# Altium PCB VESC_DEVICE.PcbDoc
Units mm, origin at the board's own origin, x right, y up, seen from the top; angles counter-clockwise.
Board outline 90 x 36 mm, 4 copper layers (TOP, LAYER_1, LAYER_2, BOTTOM), stack 0.732 mm thick; 120 components, 103 nets, 415 pads, 564 vias.
Unrouted connection lines stored in the file: 2.
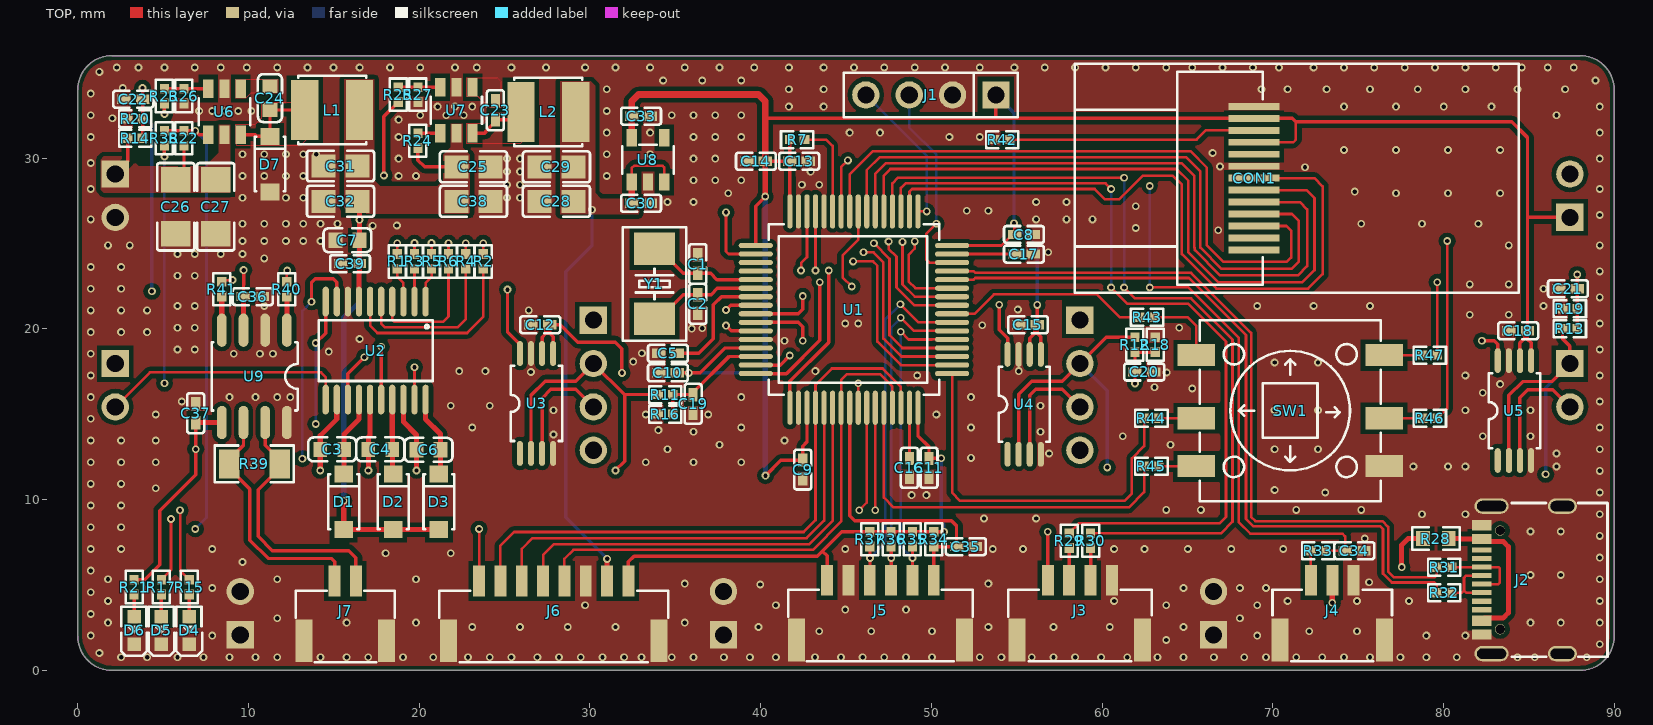
[diagram p0: TOP view]
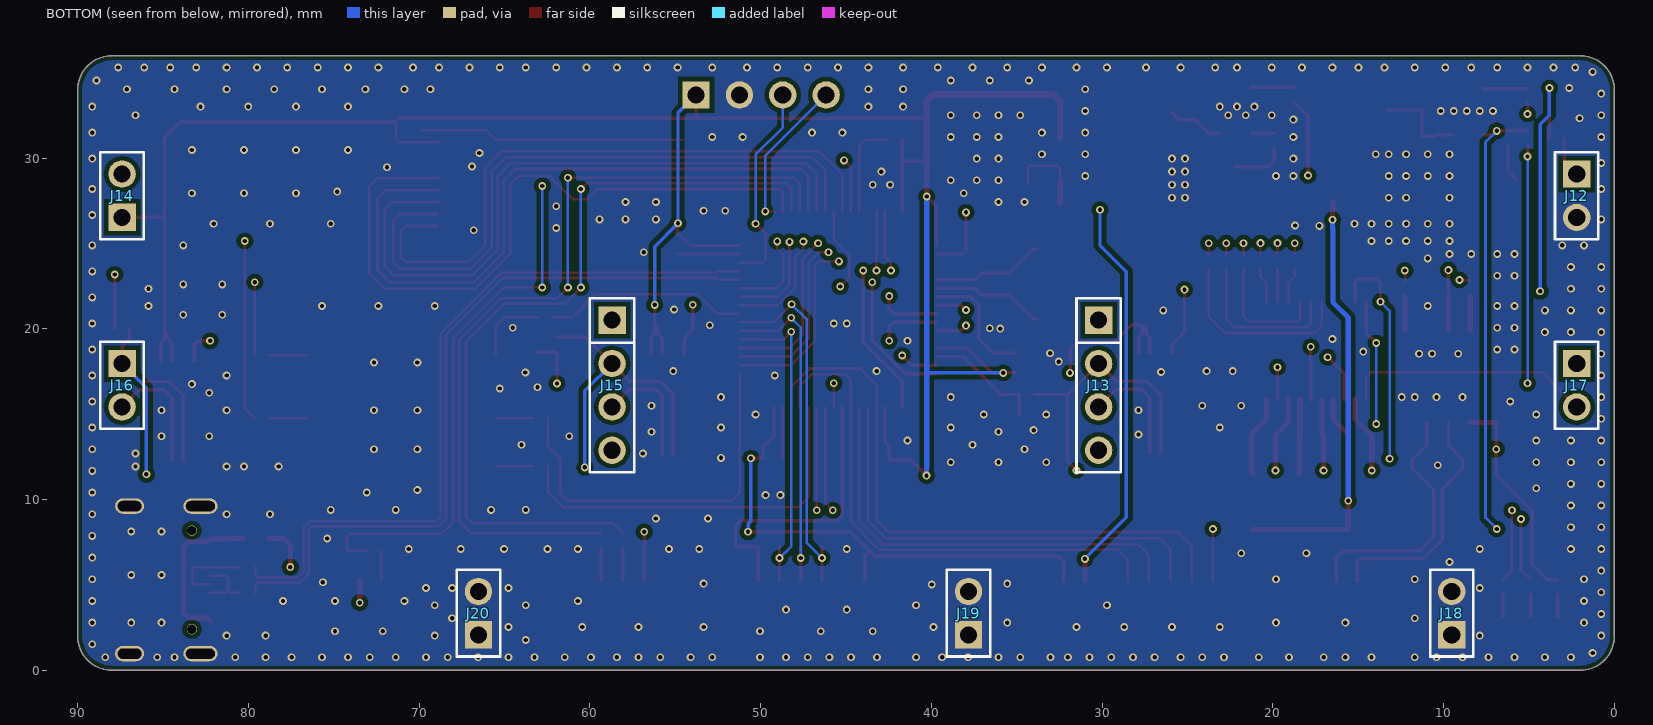
[diagram p1: BOTTOM view, seen from below]
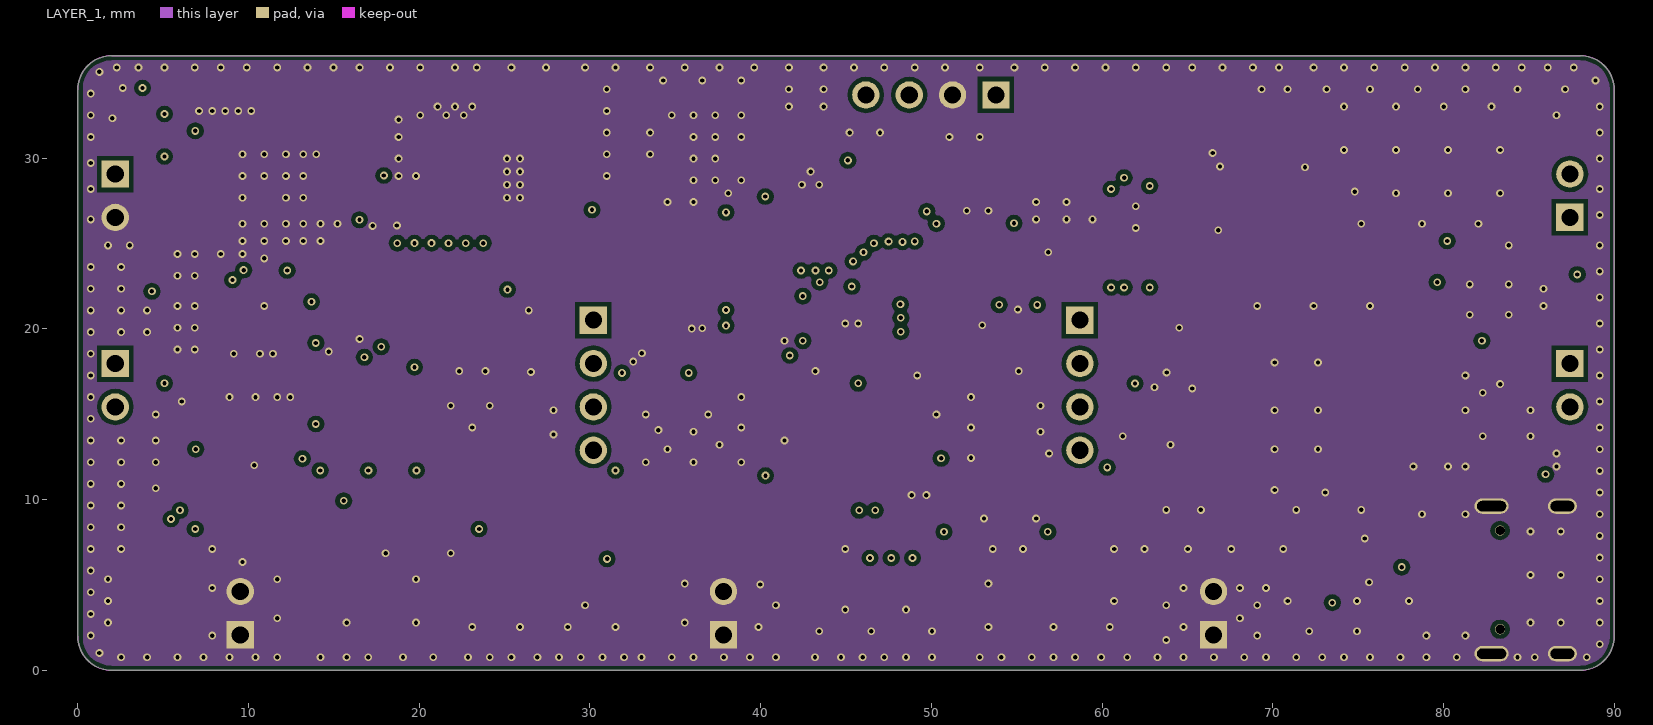
[diagram p2: LAYER_1]
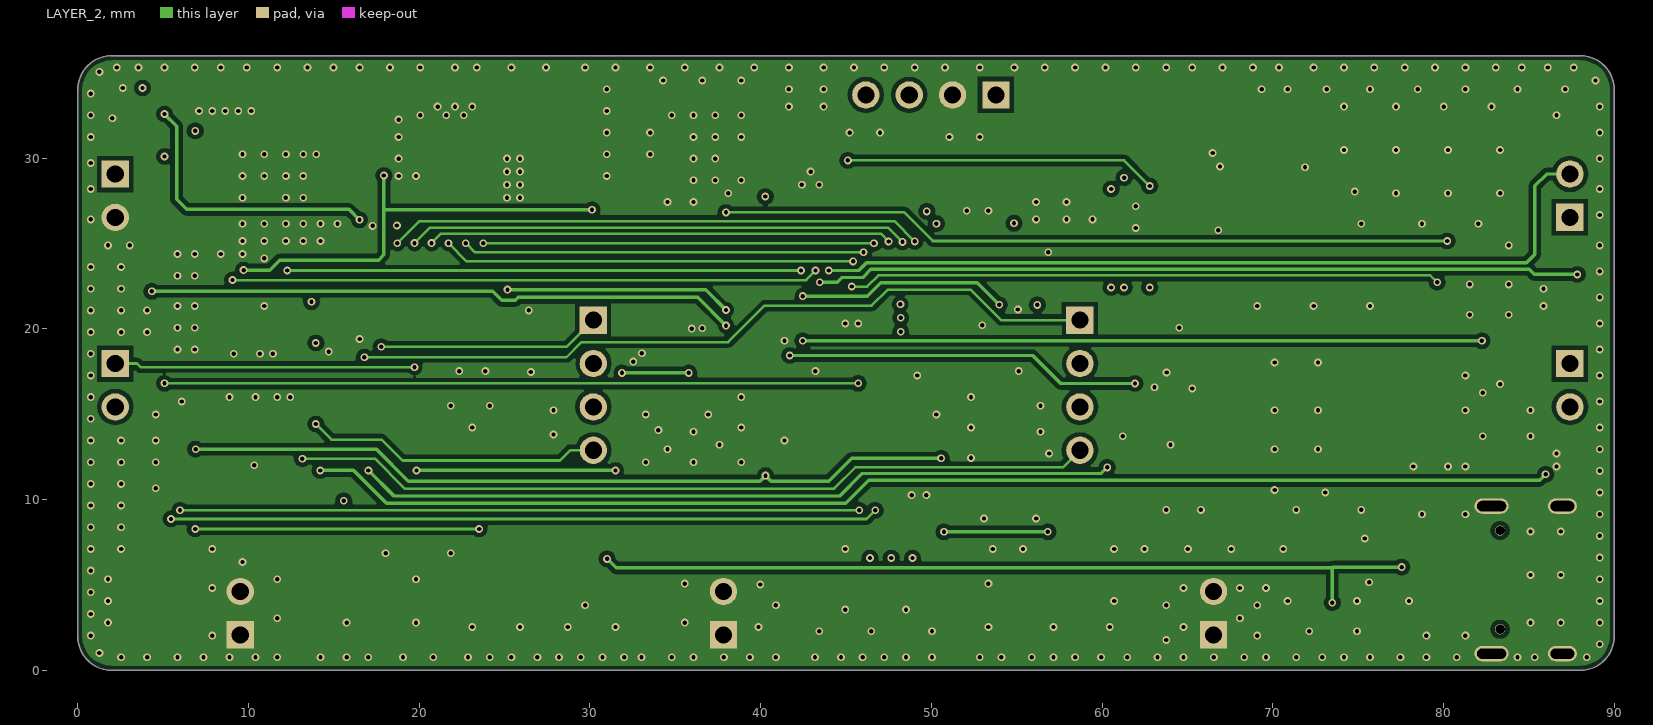
[diagram p3: LAYER_2]

## Layer stack, top to bottom
Top Solder: solder mask 0.0102, Solder Resist, Dk 3.5
TOP: signal copper 0.0305
Dielectric 1: core 0.2032, FR-4, Dk 4.5
LAYER_1: signal copper 0.0305
Dielectric2: core 0.2032, FR-4, Dk 4.5
LAYER_2: signal copper 0.0305
Dielectric3: core 0.2032, FR-4, Dk 4.5
BOTTOM: signal copper 0.0305
Bottom Solder: solder mask 0.0102, Solder Resist, Dk 3.5

## Board outline
2,0 cw(c2,2) 0,2 0,34 cw(c2,34) 2,36 88,36 cw(c88,34) 90,34 90,2 cw(c88,2) 88,0

## Design rules (kind name [scope] priority, off if disabled: settings)
BoardOutlineClearance [All] p1: gap=0.254 ignorepadtopadclearanceinfootprint=FALSE except(0: Arc-SplitContinuation Track-SplitContinuation SMDPad-SplitContinuation THPad-SplitContinuation Via-SplitContinuation Fill-SplitContinuation Poly-SplitContinuation Region-SplitContinuation Text-SplitContinuation)
Clearance [All] p1: gap=0.254 ignorepadtopadclearanceinfootprint=FALSE except(0: Arc-Hole Track-Hole SMDPad-Hole THPad-Hole Via-Hole Fill-Hole Poly-Hole Region-Hole Text-Hole)
PlaneConnect [All] p1: planeconnectstyle=Direct reliefexpansion=0.508 reliefentries=4 reliefconductorwidth=0.254 reliefairgap=0.254
PolygonConnect [All] p1: connectstyle=Direct reliefconductorwidth=0.254 reliefentries=4 polygonreliefangle="90 Angle" airgapwidth=0.254
RoomDefinition PAGE3 [InComponentClass('PAGE3')] p1: confinementstyle=ConfineIn formatcopy=TRUE lockcomponents=FALSE outline 0,0 50.8,0 50.8,25.4 0,25.4
RoomDefinition PAGE2 [InComponentClass('PAGE2')] p2: confinementstyle=ConfineIn formatcopy=TRUE lockcomponents=FALSE outline 0,0 50.8,0 50.8,25.4 0,25.4
RoomDefinition PAGE1 [InComponentClass('PAGE1')] p3: confinementstyle=ConfineIn formatcopy=TRUE lockcomponents=FALSE outline 0,0 50.8,0 50.8,25.4 0,25.4
RoutingVias [All] p1: holewidth=0.711 width=1.27 viastyle="Through Hole" minholewidth=0.711 minwidth=1.27 maxholewidth=0.711 maxwidth=1.27
SolderMaskExpansion [All] p1: expansion=0.102 istentingtop=FALSE
SupplyNets "Schematic Supply Nets_7" [InNet('12V')] p1: voltage=0.000
SupplyNets "Schematic Supply Nets_6" [InNet('3V3')] p2: voltage=0.000
SupplyNets "Schematic Supply Nets_5" [InNet('SHA')] p3: voltage=0.000
SupplyNets "Schematic Supply Nets_4" [InNet('GND')] p4: voltage=0.000
SupplyNets "Schematic Supply Nets_3" [InNet('SHC')] p5: voltage=0.000
SupplyNets "Schematic Supply Nets_2" [InNet('5V')] p6: voltage=0.000
SupplyNets "Schematic Supply Nets_1" [InNet('VIN')] p7: voltage=0.000
SupplyNets "Schematic Supply Nets" [InNet('SHB')] p8: voltage=0.000
Width [All] p1: maxlimit=0.254 minlimit=0.254 preferedwidth=0.254
29 further rules are at their usual default settings.

## Classes and differential pairs
component class PAGE3: CON1 J12 J13 J14 J15 J16 J17 J18 J19 J20 R42 R43 R44 R45 R46 R47 SW1
component class PAGE2: C23 C24 C25 C26 C27 C28 C29 C30 C31 C32 C33 C34 C35 C36 C37 C38 D7 J2 J3 J4 J5 J6 J7 L1 L2 R22 R23 R24 R25 R26 R27 R28 R29 R30 R31 R32 R33 R34 R35 R36 R37 R38 R39 R40 R41 U6 U7 U8 U9
component class PAGE1: C1 C2 C3 C4 C5 C6 C7 C8 C9 C10 C11 C12 C13 C14 C15 C16 C17 C18 C19 C20 C21 C22 C39 D1 D2 D3 D4 D5 D6 J1 R1 R2 R3 R4 R5 R6 R7 R11 R12 R13 R14 R15 R16 R17 R18 R19 R20 R21 U1 U2 U3 U4 U5 Y1

## Components (designator, comment, footprint, x,y, rotation, side; value= is the part's Value field where it differs from the comment)
C1 "15pF/50V" C0402 36.322,23.8 r270 top
C2 "15pF/50V" C0402 36.322,21.463 r90 top
C3 "2.2uF/50V" C0603 14.904,12.939 r0 top
C4 "2.2uF/50V" C0603 17.726,12.939 r0 top
C5 "100nF/50V" C0402 34.569,18.567 r180 top
C6 "2.2uF/50V" C0603 20.546,12.913 r0 top
C7 "10uF/16V" C0603 15.799,25.197 r0 top
C8 "2.2uF/6.3V" C0402 55.423,25.527 r180 top
C9 "2.2uF/6.3V" C0402 42.469,11.76 r90 top
C10 "2.2uF/6.3V" C0402 34.569,17.424 r0 top
C11 "2.2uF/6.3V" C0402 49.86,11.862 r90 top
C12 "2.2nF/50V" C0402 27.094,20.244 r0 top
C13 "2.2uF/6.3V" C0402 42.253,29.82 r180 top
C14 "2.2uF/6.3V" C0402 39.726,29.82 r0 top
C15 "2.2nF/50V" C0402 55.659,20.244 r0 top
C16 "2.2uF/6.3V" C0402 48.717,11.862 r270 top
C17 "2.2uF/6.3V" C0402 55.423,24.384 r0 top
C18 "2.2nF/50V" C0402 84.371,19.888 r0 top
C19 "NC" C0402 36.043,15.608 r90 top
C20 "NC" C0402 62.471,17.475 r180 top
C21 "NC" C0402 87.286,22.352 r0 top
C22 "100nF/50V" C0402 3.251,33.452 r0 top
C23 "10nF/50V" C0402 24.468,32.805 r90 top
C24 "100nF/100V" C0603 11.26,33.519 r90 top
C25 "22uF/16V" C0805 23.18,29.49 r0 top
C26 "2.2uF/100V" C1206 5.74,27.153 r270 top
C27 "2.2uF/100V" C1206 8.077,27.153 r270 top
C28 "22uF/6.3V" C0805 28.042,27.47 r180 top
C29 "22uF/6.3V" C0805 28.042,29.49 r180 top
C30 "10uF/6.3V" C0402 32.995,27.356 r0 top
C31 "22uF/16V" C0805 15.392,29.54 r180 top
C32 "22uF/16V" C0805 15.392,27.47 r180 top
C33 "10uF/6.3V" C0402 32.995,32.461 r0 top
C34 "100nF/50V" C0402 74.778,7.01 r180 top
C35 "100nF/50V" C0402 52.019,7.251 r0 top
C36 "2.2uF/6.3V" C0402 10.255,21.895 r180 top
C37 "2.2uF/6.3V" C0402 6.909,15.061 r90 top
C38 "22uF/16V" C0805 23.18,27.47 r0 top
C39 "100nF/50V" C0402 15.951,23.825 r0 top
CON1 "OLED" 0_78OLED 71.399,28.828 r0 top
D1 "DSK310" SOD-123F 15.58,9.875 r270 top
D2 "DSK310" SOD-123F 18.478,9.875 r270 top
D3 "DSK310" SOD-123F 21.153,9.875 r270 top
D4 "LED_GREEN" LED0603 6.528,2.337 r90 top
D5 "LED_RED" LED0603 4.902,2.337 r90 top
D6 "LED_BLUE" LED0603 3.302,2.337 r90 top
D7 "DSK310" SOD-123F 11.26,29.649 r270 top
J1 "4 HEADER" ISP-4P-2_54 49.973,33.704 r180 top
J2 "TYPE-C_16P" TYPE-C_16P 85.601,5.3 r90 top
J3 "1.25-4PWTDK" SMD-4P-1_25 58.7,3.327 r0 top
J4 "1.25-3PWTDK" SMD-3P-1_25 73.482,3.327 r0 top
J5 "1.25-6PWTDK" SMD-6P-1_25 47.015,3.327 r0 top
J6 "1.25-8PWTDK" SMD-8P-1_25 27.883,3.277 r0 top
J7 "1.25-2PWTDK" SMD-2P-1_25 15.672,3.277 r0 top
J12 "CON2" PZ-2P-2_54 2.2,27.8 r270 bottom
J13 "CON4" PZ-4P-2_54 30.2,16.7 r270 bottom
J14 "CON2" PZ-2P-2_54 87.4,27.8 r90 bottom
J15 "CON4" PZ-4P-2_54 58.7,16.7 r270 bottom
J16 "CON2" PZ-2P-2_54 87.4,16.7 r270 bottom
J17 "CON2" PZ-2P-2_54 2.2,16.7 r270 bottom
J18 "CON2" PZ-2P-2_54 9.52,3.35 r90 bottom
J19 "CON2" PZ-2P-2_54 37.82,3.35 r90 bottom
J20 "CON2" PZ-2P-2_54 66.53,3.35 r90 bottom
L1 "22uH_1A" L4020 14.905,32.818 r0 top
L2 "2.2uH_2A" L4020 27.564,32.706 r0 top
R1 "0R/1%" R0402 18.72,23.952 r90 top
R2 "0R/1%" R0402 23.749,23.952 r90 top
R3 "0R/1%" R0402 19.725,23.952 r90 top
R4 "0R/1%" R0402 22.733,23.952 r90 top
R5 "0R/1%" R0402 20.726,23.952 r90 top
R6 "0R/1%" R0402 21.717,23.952 r90 top
R7 "10K/1%" R0402 42.139,31.09 r180 top
R11 "39K/1%" R0402 34.417,16.154 r180 top
R12 "39K/1%" R0402 61.925,19.075 r90 top
R13 "39K/1%" R0402 87.4,20.015 r180 top
R14 "39K/1%" R0402 3.365,31.166 r180 top
R15 "2.2K/1%" R0402 6.528,4.877 r270 top
R16 "2.2K/1%" R0402 34.417,15.011 r0 top
R17 "2.2K/1%" R0402 4.902,4.877 r270 top
R18 "2.2K/1%" R0402 63.119,19.075 r270 top
R19 "2.2K/1%" R0402 87.4,21.184 r0 top
R20 "2.2K/1%" R0402 3.365,32.309 r0 top
R21 "2.2K/1%" R0402 3.302,4.877 r270 top
R22 "100K/1%" R0402 6.223,31.166 r270 top
R23 "120K/1%" R0402 5.08,33.636 r270 top
R24 "100K/1%" R0402 19.927,31.024 r90 top
R25 "100K/1%" R0402 18.771,33.722 r270 top
R26 "8.2K/1%" R0402 6.223,33.636 r90 top
R27 "13.7K/1%" R0402 19.927,33.722 r90 top
R28 "NC" R0603 79.553,7.722 r180 top
R29 "22R/1%" R0402 58.075,7.595 r90 top
R30 "22R/1%" R0402 59.325,7.595 r90 top
R31 "22R/1%" R0402 80.043,6.045 r180 top
R32 "22R/1%" R0402 80.043,4.547 r180 top
R33 "100R/1%" R0402 72.664,7.01 r0 top
R34 "10K/1%" R0402 50.14,7.683 r90 top
R35 "4.7K/1%" R0402 48.89,7.683 r90 top
R36 "4.7K/1%" R0402 47.64,7.683 r90 top
R37 "4.7K/1%" R0402 46.391,7.683 r90 top
R38 "NC_10K/1%" R0402 5.08,31.166 r90 top
R39 "120R/1%" R1206 10.344,12.09 r180 top
R40 "0R/1%" R0402 12.249,22.323 r90 top
R41 "0R/1%" R0402 8.439,22.327 r90 top
R42 "10R/1%" R0402 54.153,31.09 r180 top
R43 "100R/1%" R0402 62.636,20.676 r180 top
R44 "100R/1%" R0402 62.89,14.765 r180 top
R45 "100R/1%" R0402 62.89,11.965 r180 top
R46 "100R/1%" R0402 79.197,14.765 r180 top
R47 "100R/1%" R0402 79.197,18.465 r180 top
SW1 "SW_TM_2027" SW_SMD_6P_10X10 71.018,15.215 r0 top
U1 "STM32F405RGT6" LQFP64_10X10_05P 45.466,21.133 r270 top
U2 "FD6288T" TSSOP-20 17.45,18.73 r180 top
U3 "INA240A1PWR" TSSOP-8 26.873,15.632 r0 top
U4 "INA240A1PWR" TSSOP-8 55.438,15.581 r0 top
U5 "INA240A1PWR" TSSOP-8 84.15,15.215 r0 top
U6 "LMR16006XDDCR" SOT-23-6 8.594,32.719 r90 top
U7 "LP6460B6F" SOT-23-6 22.179,32.805 r90 top
U8 "XC6219B332MR" SOT-23-5 33.399,29.896 r270 top
U9 "TJA1042T/1J" SOP-8 10.344,17.22 r180 top
Y1 "8M" SMD5032-2P 33.782,22.631 r90 top

## Footprints (in the part's own frame and the unit in brackets; to place one, negate y for a bottom-side part, rotate by r counter-clockwise, add the part's x,y. Pads: shape width x height; smd on the part's side, far side on the other; paste and mask are expansions set on the pad)
0_78OLED [mm] "0_78OLED"
  rect 3x0.4 smd: 1(-2.5,-4.2) 2(-2.5,-3.5) 3(-2.5,-2.8) 4(-2.5,-2.1) 5(-2.5,-1.4) 6(-2.5,-0.7) 7(-2.5,0) 8(-2.5,0.7) 9(-2.5,1.4) 10(-2.5,2.1) 11(-2.5,2.8) 12(-2.5,3.5) 13(-2.5,4.2)
  silkscreen extent -13,-6.7 13,6.7
C0402 [mil] "C0402"
  rect 31.1x21.3 smd: 1(-21.5,0) 2(21.5,0)
  silkscreen extent -46,-20 46,20, body extent -43,-16 43,16, height 150
C0603 [mil] "C0603"
  rect 31.5x35.4 smd: 1(-27.6,0) 2(27.6,0)
  silkscreen extent -55,-28 55,28
C0805 [mil] "C0805"
  rect 55.5x53.1 smd: 1(-39.4,0) 2(39.4,0)
  silkscreen extent -77,-36 77,36
C1206 [mil] "C1206"
  rect 58.5x68 smd: 1(-62.7,0) 2(62.6,0)
  silkscreen extent -101,-43 101,43, body extent -95,-39 95,39, height 150
ISP-4P-2_54 [mm] "ISP-4P-2_54"
  rect 1.6x1.6 hole 1: 1(-3.81,0)
  round 1.6 hole 1: 2(-1.27,0) 3(1.27,0) 4(3.81,0)
  silkscreen extent -5.1,-1.3 5.1,1.3, body extent -4.7,-0.9 4.7,0.9, height 3.81
L4020 [mil] "L4020"
  rect 63x137.8 smd: 1(-63,0) 2(63,0)
  silkscreen extent -79,-79 79,79
LED0603 [mil] "LED0603"
  rect 31.5x31.5 smd: 1(-31.5,0) 2(31.5,0)
  silkscreen extent -59,-30 55,30, body extent -51,-20 51,20, height 150
LQFP64_10X10_05P [mil] "LQFP64_10X10_05P"
  oval 11.8x78.7 smd: 1(-147.6,-226.4) 2(-128,-226.4) 3(-108.3,-226.4) 4(-88.6,-226.4) 5(-68.9,-226.4) 6(-49.2,-226.4) 7(-29.5,-226.4) 8(-9.8,-226.4) 9(9.8,-226.4) 10(29.5,-226.4) 11(49.2,-226.4) 12(68.9,-226.4) 13(88.6,-226.4) 14(108.3,-226.4) 15(128,-226.4) 16(147.6,-226.4) 33(147.6,226.4) 34(128,226.4) 35(108.3,226.4) 36(88.6,226.4) 37(68.9,226.4) 38(49.2,226.4) 39(29.5,226.4) 40(9.8,226.4) 41(-9.8,226.4) 42(-29.5,226.4) 43(-49.2,226.4) 44(-68.9,226.4) 45(-88.6,226.4) 46(-108.3,226.4) 47(-128,226.4) 48(-147.6,226.4)
  oval 78.7x11.8 smd: 17(226.4,-147.6) 18(226.4,-128) 19(226.4,-108.3) 20(226.4,-88.6) 21(226.4,-68.9) 22(226.4,-49.2) 23(226.4,-29.5) 24(226.4,-9.8) 25(226.4,9.8) 26(226.4,29.5) 27(226.4,49.2) 28(226.4,68.9) 29(226.4,88.6) 30(226.4,108.3) 31(226.4,128) 32(226.4,147.6) 49(-226.4,147.6) 50(-226.4,128) 51(-226.4,108.3) 52(-226.4,88.6) 53(-226.4,68.9) 54(-226.4,49.2) 55(-226.4,29.5) 56(-226.4,9.8) 57(-226.4,-9.8) 58(-226.4,-29.5) 59(-226.4,-49.2) 60(-226.4,-68.9) 61(-226.4,-88.6) 62(-226.4,-108.3) 63(-226.4,-128) 64(-226.4,-147.6)
  silkscreen extent -197,-239 197,197, body extent -268,-268 268,268, height 150
PZ-2P-2_54 [mm] "PZ-2P-2_54"
  rect 1.6x1.6 hole 1: 1(-1.27,0)
  round 1.6 hole 1: 2(1.27,0)
  silkscreen extent -2.54,-1.27 2.54,1.27, body extent -2.2,-0.9 2.2,0.9, height 3.81
PZ-4P-2_54 [mm] "PZ-4P-2_54"
  rect 1.6x1.6 hole 1: 1(-3.81,0)
  round 1.6 hole 1: 2(-1.27,0) 3(1.27,0) 4(3.81,0)
  silkscreen extent -5.1,-1.3 5.1,1.3, body extent -4.7,-0.9 4.7,0.9, height 3.81
R0402 [mil] "R0402"
  rect 22.3x21.3 smd: 1(-17,0) 2(17,0)
  silkscreen extent -37,-20 37,20, body extent -32,-16 32,16, height 150
R0603 [mil] "R0603"
  rect 31.7x34 smd: 1(-29.6,0) 2(29.6,0)
  silkscreen extent -54,-26 54,26, body extent -51,-20 51,20, height 150
R1206 [mm] "R1206"
  rect 1.199x1.699 smd: 1(-1.478,0) 2(1.478,0)
  silkscreen extent -2.31,-1.08 2.31,1.08, body extent -2.2,-1 2.2,1, height 3.81
SMD5032-2P [mil] "SMD5032-2P"
  rect 74.8x94.5 smd: 1(-80.7,0) 2(80.7,0)
  silkscreen extent -131,-73 131,73, body extent -122,-51 122,51, height 150
SMD-2P-1_25 [mil] "SMD-2P-1_25"
  rect 27.6x70.9 smd: 1(-24.6,76.75) 2(24.6,76.75)
  rect 39.4x98.4 smd: 3(-95.5,-61.05) 4(95.5,-61.05)
  silkscreen extent -114,-110 114,55
SMD-3P-1_25 [mm] "SMD-3P-1_25"
  rect 0.701x1.801 smd: 1(-1.25,1.95) 2(0,1.95) 3(1.25,1.95)
  rect 1.001x2.499 smd: 4(-3.05,-1.551) 5(3.05,-1.551)
  silkscreen extent -3.5,-2.8 3.5,1.4
SMD-4P-1_25 [mm] "SMD-4P-1_25"
  rect 0.701x1.801 smd: 1(-1.874,1.95) 2(-0.625,1.95) 3(0.625,1.95) 4(1.874,1.95)
  rect 1.001x2.499 smd: 5(-3.675,-1.551) 6(3.675,-1.551)
  silkscreen extent -4.2,-2.8 4.2,1.4
SMD-6P-1_25 [mil] "SMD-6P-1_25"
  rect 27.6x70.9 smd: 1(-123,76.75) 2(-73.8,76.75) 3(-24.6,76.75) 4(24.6,76.75) 5(73.8,76.75) 6(123,76.75)
  rect 39.4x98.4 smd: 7(-193.9,-61.05) 8(193.9,-61.05)
  silkscreen extent -213,-110 213,55
SMD-8P-1_25 [mil] "SMD-8P-1_25"
  rect 27.6x70.9 smd: 1(-172.2,76.75) 2(-123,76.75) 3(-73.8,76.75) 4(-24.6,76.75) 5(24.6,76.75) 6(73.8,76.75) 7(123,76.75) 8(172.2,76.75)
  rect 39.4x98.4 smd: 9(-243.1,-61.05) 10(243.1,-61.05)
  silkscreen extent -264,-110 264,55
SOD-123F [mm] "SOD-123F"
  rect 1.001x1.1 smd: 1(-1.628,0) 2(1.628,0)
  silkscreen extent -1.6,-0.9 1.6,0.9, body extent -2.2,-0.7 2.2,0.7, height 3.81
SOP-8 [mil] "SOP-8"
  oval 22.4x76.8 smd: 1(-75,-106.5) 2(-25,-106.5) 3(25,-106.5) 4(75,-106.5) 5(75,106.5) 6(25,106.5) 7(-25,106.5) 8(-75,106.5)
  silkscreen extent -118,-118 98,79, body extent -91,-150 91,150, height 150
SOT-23-5 [mm] "SOT-23-5"
  rect 1.001x0.599 smd: 1(1.301,-0.95) 2(1.301,0) 3(1.301,0.95) 4(-1.301,0.95) 5(-1.301,-0.95)
  silkscreen extent -0.9,-1.83 1.53,1.5, body extent -1.9,-1.4 1.9,1.4, height 3.81
SOT-23-6 [mm] "SOT-23-6"
  rect 1.1x0.599 smd: 1(1.349,-0.95) 2(1.349,0) 3(1.349,0.95) 4(-1.349,0.95) 5(-1.349,0) 6(-1.349,-0.95)
  silkscreen extent -0.8,-1.93 1.63,1.5, body extent -2,-1.4 2,1.4, height 3.81
SW_SMD_6P_10X10 [mm] "SW_SMD_6P_10X10"
  rect 2.2x1.3 smd: 1(-5.5,3.25) 2(-5.5,-0.45) 3(-5.5,-3.25) 4(5.5,-3.25) 5(5.5,-0.45) 6(5.5,3.25)
  silkscreen extent -5.3,-5.3 5.3,5.3
TSSOP-8 [mm] "TSSOP-8"
  oval 0.353x1.453 smd: 1(-0.975,-2.926) 2(-0.325,-2.926) 3(0.325,-2.926) 4(0.975,-2.926) 5(0.975,2.926) 6(0.325,2.926) 7(-0.325,2.926) 8(-0.975,2.926)
  silkscreen extent -2,-3.1 1.5,2.2
TSSOP-20 [mil] "TSSOP-20"
  oval 14.3x68.6 smd: 1(-115.2,-113) 2(-89.6,-113) 3(-64,-113) 4(-38.4,-113) 5(-12.8,-113) 6(12.8,-113) 7(38.4,-113) 8(64,-113) 9(89.6,-113) 10(115.2,-113) 11(115.2,113) 12(89.6,113) 13(64,113) 14(38.4,113) 15(12.8,113) 16(-12.8,113) 17(-38.4,113) 18(-64,113) 19(-89.6,113) 20(-115.2,113)
  silkscreen extent -132,-70 132,70, body extent -126,-150 126,150, height 150
TYPE-C_16P [mil] "TYPE-C_16P"
  oval 35.4x78.7 hole 23.6 slot 66.9 at 90 deg: 1(-170.1,109.8) 2(170.1,109.8)
  oval 35.4x66.9 hole 23.6 slot 55.1 at 90 deg: 3(-170.1,-53.6) 4(170.1,-53.6)
  rect 23.6x45.3 smd: A1B12(-126,132.4) A4B9(-94.5,132.4) B1A12(126,132.4) B4A9(94.5,132.4)
  rect 11.8x45.3 smd: A5(-49.2,132.4) A6(-9.8,132.4) A7(9.8,132.4) A8(49.2,132.4) B5(68.9,132.4) B6(29.5,132.4) B7(-29.5,132.4) B8(-68.9,132.4)
  round 23.6 hole 21.7 unplated: PH1(-113.8,90.1) PH2(113.8,90.1)
  silkscreen extent -177,-158 177,63, body extent -193,-158 193,158, height 150

## Part data
C1 C2 C3 C4 C5 C6 C7 C8 C9 C10 C11 C12 C13 C14 C15 C16 C17 C18 C19 C20 C21 C22 C23 C24 C25 C26 C27 C28 C29 C30 C31 C32 C33 C34 C35 C36 C37 C38 C39: library part "CAP NP"
  C1 C2 C5 C8 C9 C10 C11 C12 C13 C14 C15 C16 C17 C18 C19 C20 C21 C22 C23 C30 C33 C34 C35 C36 C37 C39: PCB Footprint=C0402
  C3 C4 C6 C7 C24: PCB Footprint=C0603
  C25 C28 C29 C31 C32 C38: PCB Footprint=C0805
  C26 C27: PCB Footprint=C1206
D1 D2 D3 D7: library part "DIODE SCHOTTKY21", PCB Footprint=SOD-123F
D4 D5 D6: library part LED, PCB Footprint=LED0603
L1 L2: library part INDUCTOR, PCB Footprint=L4020
R1 R2 R3 R4 R5 R6 R7 R11 R12 R13 R14 R15 R16 R17 R18 R19 R20 R21 R22 R23 R24 R25 R26 R27 R28 R29 R30 R31 R32 R33 R34 R35 R36 R37 R38 R39 R40 R41 R42 R43 R44 R45 R46 R47: library part RESISTOR
  R1 R2 R3 R4 R5 R6 R7 R11 R12 R13 R14 R15 R16 R17 R18 R19 R20 R21 R22 R23 R24 R25 R26 R27 R29 R30 R31 R32 R33 R34 R35 R36 R37 R38 R40 R41 R42 R43 R44 R45 R46 R47: PCB Footprint=R0402
  R28: PCB Footprint=R0603
  R39: PCB Footprint=R1206
Y1: library part CRYSTAL, PCB Footprint=SMD5032-2P
CON1: PCB Footprint=0_78OLED
J1: PCB Footprint=ISP-4P-2_54
J2: PCB Footprint=TYPE-C_16P
J3: PCB Footprint=SMD-4P-1_25
J4: PCB Footprint=SMD-3P-1_25
J5: PCB Footprint=SMD-6P-1_25
J6: PCB Footprint=SMD-8P-1_25
J7: PCB Footprint=SMD-2P-1_25
J12 J14 J16 J17 J18 J19 J20: PCB Footprint=PZ-2P-2_54
J13 J15: PCB Footprint=PZ-4P-2_54
SW1: PCB Footprint=SW_SMD_6P_10X10
U1: PCB Footprint=LQFP64_10X10_05P
U2: PCB Footprint=TSSOP-20
U3 U4 U5: PCB Footprint=TSSOP-8
U6 U7: PCB Footprint=SOT-23-6
U8: PCB Footprint=SOT-23-5
U9: PCB Footprint=SOP-8

## Via types
v1: diameter 0.457, hole 0.254, TOP to BOTTOM, tented both sides, 473 vias
v2: diameter 0.457, hole 0.254, TOP to BOTTOM, 91 vias

## Nets (pads, with @x,y where several pads share a name; then routed paths per layer and width w, separated by ;. In a path a pad name is that pad's centre, name@x,y a point inside that pad or via, vN(x,y) a via of type N, cw(c..) or ccw(c..) an arc to the next point about the centre after c; other vN are vias at no path point)
3V3: C8.2 C9.2 C10.2 C11.2 C12.2 C13.2 C14.2 C15.2 C18.2 C33.1 C37.1 CON1.10 CON1.12 J1.1 J3.1 J5.1 J6.8 J14.1 R7.2 R21.1 R34.2 R35.2 R36.2 R37.2 U1.1 U1.13 U1.19 U1.32 U1.48 U1.64 U3.5 U3.6 U4.5 U4.6 U5.5 U5.6 U8.5 U9.5 | length 258.7
  TOP w0.152: U1.48 54.107,24.882 54.752,25.527 C8.2 ; CON1.10 71.197,30.928 71.349,31.08 71.349,32.128
  TOP w0.2: R21.1 3.937,5.309 4.801,6.172 4.801,9.347 6.909,11.455 v2(6.909,12.954) C37.1 ; U3.6 27.198,19.511 27.425,19.738 ; U3.5 27.849,19.538 27.649,19.738 ; v2(31.877,17.424) 31.877,18.847 31.496,19.228 29.278,19.228 28.262,20.244 C12.2 ; J6.8 32.256,6.354 32.583,6.68 43.307,6.68 43.612,6.985 ; C10.2 v2(35.789,17.424) 36.474,17.424 37.932,18.882 U1.13 ; U1.1 39.715,27.193 v2(40.272,27.749) ; C14.2 C13.2 ; 40.272,32.334 40.278,32.328 53.797,32.328 ; v2(40.284,11.405) 41.186,12.306 C9.2 42.469,13.137 42.715,13.383 U1.19 ; R7.2 C13.2 ; U1.64 41.717,28.882 41.707,28.893 C13.2 ; J5.1 43.891,6.705 43.612,6.985 ; U1.32 49.215,13.752 49.86,13.106 C11.2 49.873,12.421 v2(50.571,12.421) ; v2(50.736,8.115) R34.2 R35.2 R36.2 R37.2 44.742,8.115 43.612,6.985 ; J1.1 53.783,32.343 53.797,32.328 ; v2(54.839,26.187) 54.877,26.149 C8.2 ; U4.6 55.763,19.46 56.049,19.746 ; v2(56.205,21.407) C15.2 ; U4.5 56.413,19.538 56.205,19.746 ; v2(56.82,8.115) 56.82,7.622 56.825,7.616 J3.1 ; U5.6 84.475,19.172 84.747,19.444 ; U5.5 85.126,19.182 84.917,19.391 ; J14.1 84.93,26.53 84.917,26.543 ; 27.425,19.738 27.425,19.914 ; 27.425,19.738 27.649,19.738 ; 27.425,19.914 27.425,20.029 C12.2 ; 27.425,19.914 27.598,19.914 27.649,19.863 ; C12.2 27.649,20.235 27.649,19.863 ; 27.649,19.738 27.649,19.863 ; 53.797,32.328 CON1.12 71.149,32.328 71.349,32.128 84.001,32.128 84.917,31.211 84.917,26.543 ; 56.049,19.746 56.049,20.088 C15.2 ; 56.049,19.746 56.205,19.746 ; 56.205,19.746 C15.2 ; 84.747,19.444 84.864,19.444 84.917,19.391 ; 84.747,19.444 84.747,19.718 C18.2 ; 84.917,19.391 C18.2 ; C18.2 84.917,26.543
  TOP w0.3: C37.1 U9.5 ; v2(40.272,27.749) C14.2
  TOP w0.4: U8.5 C33.1 32.448,33.331 32.848,33.731 39.872,33.731 40.272,33.331 40.272,32.334 C14.2
  LAYER_2 w0.2: v2(6.909,12.954) 17.501,12.954 19.372,11.082 39.962,11.082 v2(40.284,11.405) 40.607,11.082 44.001,11.082 45.339,12.421 v2(50.571,12.421) ; v2(31.877,17.424) v2(35.789,17.424) ; v2(50.736,8.115) v2(56.82,8.115)
  BOTTOM w0.2: v2(35.789,17.424) 40.221,17.424 40.272,17.374 ; v2(50.571,12.421) 50.571,8.735 50.736,8.571 v2(50.736,8.115) ; J1.1 54.839,32.648 v2(54.839,26.187) 56.205,24.821 v2(56.205,21.407)
  BOTTOM w0.3: v2(40.272,27.749) 40.272,17.374 40.272,11.873 40.284,11.86 v2(40.284,11.405)
5V: C28.1 C29.1 C30.1 C36.2 J4.2 J6.7 L2.2 R25.2 R28.2 U8.1 U8.3 U9.3 | length 114.8
  TOP w0.152: U8.1 32.448,29.414 32.601,29.566 34.241,29.566 34.348,29.458 U8.3
  TOP w0.2: C36.2 9.709,22.563 9.716,22.57 v2(9.716,23.444) ; v2(17.932,28.981) 17.932,32.439 18.771,33.277 R25.2
  TOP w0.3: U9.3 C36.2 ; J6.7 v2(31.007,6.528) ; v2(73.482,3.962) J4.2 ; v2(77.546,6.045) 77.546,7.341 77.927,7.722 R28.2
  TOP w0.4: C30.1 U8.1
  LAYER_2 w0.2: v2(9.716,23.444) 11.252,23.444 11.836,24.028 17.628,24.028 17.932,24.333 17.932,26.924 ; v2(17.932,28.981) 17.932,26.924 ; v2(30.124,26.975) 17.983,26.975 17.932,26.924 ; v2(31.007,6.528) 31.535,6 73.462,6 73.482,6.02 ; v2(73.482,3.962) 73.482,6.02 ; v2(77.546,6.045) 73.508,6.045 73.482,6.02
  BOTTOM w0.2: v2(30.124,26.975) 30.124,24.892 28.575,23.343 28.575,8.96 v2(31.007,6.528)
12V: C7.2 C25.1 C31.1 C32.1 C38.1 C39.2 D1.2 D2.2 D3.2 L1.2 R23.2 R24.1 U2.7 U7.5 | length 50.3
  TOP w0.2: v2(5.08,32.588) R23.2 ; R24.1 19.927,29.883 20.319,29.49 C25.1
  TOP w0.3: v2(15.58,9.931) D1.2 D2.2 D3.2 ; C32.1 16.5,27.364 v2(16.5,26.391) C7.2 16.5,24.47 16.497,24.468 C39.2 16.497,23.278 16.474,23.255 U2.7
  TOP w0.4: C32.1@16.474,27.04 C32.1@16.485,27.051
  LAYER_2 w0.2: v2(5.08,32.588) 5.791,31.877 5.791,27.584 6.375,27 15.89,27 v2(16.5,26.391)
  BOTTOM w0.3: v2(15.58,9.931) 15.58,20.66 16.485,21.565 16.485,25.87 16.5,25.885 v2(16.5,26.391)
ADC_TEMP: J14.2 U1.17 | length 57.1
  TOP w0.2: U1.17 41.717,16.927 43.993,19.202 v2(43.993,23.419)
  LAYER_2 w0.2: v2(43.993,23.419) 45.745,23.419 46.2,23.873 84.858,23.873 85.344,24.359 85.344,28.372 86.042,29.07 J14.2
ADC_VIN: C22.2 R14.1 R20.2 U1.11 | length 51.6
  TOP w0.2: R14.1 R20.2 C22.2 v2(3.797,34.112) ; v2(37.973,20.193) 38.283,19.883 U1.11
  LAYER_2 w0.2: v2(4.343,22.2) 24.308,22.2 24.841,21.666 25.629,21.666 25.806,21.844 36.322,21.844 v2(37.973,20.193)
  BOTTOM w0.2: v2(3.797,34.112) 3.797,32.525 4.343,31.979 v2(4.343,22.2)
BUCK_EN: J6.1 R22.1 R38.2 U6.4 | length 46.2
  TOP w0.152: J6.1 v2(23.509,8.28)
  TOP w0.2: R38.2 R22.1 v2(6.883,31.598) 6.891,31.598 7.118,31.371 U6.4
  LAYER_2 w0.152: v2(6.883,8.28) v2(23.509,8.28)
  BOTTOM w0.152: v2(6.883,8.28) 7.544,8.941 7.544,30.937 v2(6.883,31.598)
CAN_H: J7.2 R39.1 U9.7 | length 15.2
  TOP w0.2: U9.7 10.979,13.184 11.823,12.341 R39.1 11.823,11.84 10.566,10.584 10.566,7.849 11.405,7.01 15.875,7.01 16.297,6.589 J7.2
CAN_L: J7.1 R39.2 U9.6 | length 14.4
  TOP w0.2: U9.6 9.709,13.184 8.866,12.341 R39.2 8.866,11.84 10.084,10.623 10.084,7.62 11.151,6.553 14.847,6.553 15.047,6.354 J7.1
CAN_RX: R41.2 U1.61 | length 38.5
  TOP w0.152: R41.2 8.541,22.86 v2(9.065,22.86) ; v2(43.216,23.419) U1.61
  LAYER_2 w0.152: v2(9.065,22.86) 42.657,22.86 v2(43.216,23.419)
CAN_TX: R40.2 U1.62 | length 34.4
  TOP w0.152: R40.2 12.249,23.4 v2(12.268,23.419) ; v2(42.367,23.419) 42.367,23.85 42.715,24.198 U1.62
  LAYER_2 w0.152: v2(12.268,23.419) v2(42.367,23.419)
CURRENT_A: U1.8 U3.8 | length 19.2
  TOP w0.2: v2(25.171,22.301) 25.171,19.834 25.898,19.108 U3.8 ; v2(37.973,21.107) 38.247,21.382 U1.8
  LAYER_2 w0.2: v2(25.171,22.301) 36.779,22.301 v2(37.973,21.107)
CURRENT_B: U1.9 U4.8 | length 19.1
  TOP w0.2: U1.9 42.195,20.884 42.469,21.158 v2(42.469,21.92) ; v2(53.975,21.412) 53.975,19.948 54.463,19.46 U4.8
  LAYER_2 w0.2: v2(42.469,21.92) 46.253,21.92 47.041,22.708 52.68,22.708 v2(53.975,21.412)
CURRENT_C: U1.10 U5.8 | length 45.4
  TOP w0.2: U1.10 42.202,20.383 42.469,20.117 v2(42.469,19.304) ; v2(82.245,19.304) 82.965,19.304 83.175,19.094 U5.8
  LAYER_2 w0.2: v2(42.469,19.304) v2(82.245,19.304)
FAULT: R7.1 U1.59 | length 5.6
  TOP w0.152: R7.1 43.84,31.09 44.216,30.714 U1.59
GHA: J17.1 U2.19 | length 19.5
  TOP w0.2: U2.19 v2(19.725,17.755)
  LAYER_2 w0.152: J17.1 3.468,17.97 3.683,17.755 v2(19.725,17.755)
GHB: J13.1 U2.16 | length 16.2
  TOP w0.2: U2.16 v2(17.775,18.948)
  LAYER_2 w0.152: v2(17.775,18.948) 28.638,18.948 J13.1
GHC: J15.1 U2.13 | length 47.2
  TOP w0.2: U2.13 15.824,17.373 v2(16.789,18.339)
  LAYER_2 w0.152: v2(16.789,18.339) 28.626,18.339 29.515,19.228 38.1,19.228 40.234,21.361 46.507,21.361 47.447,22.301 52.299,22.301 54.09,20.51 J15.1
GLA: J17.2 U2.11 | length 14.6
  TOP w0.152: J17.2 4.22,17.45 14.249,17.45 14.523,17.176 U2.11
GLB: J13.4 U2.10 | length 24.8
  TOP w0.2: v2(13.945,19.177) 14.523,19.756 U2.10
  LAYER_2 w0.152: v2(13.945,14.427) 14.859,13.513 17.805,13.513 19.025,12.294 28.245,12.294 28.841,12.89 J13.4
  BOTTOM w0.152: v2(13.945,14.427) v2(13.945,19.177)
GLC: J15.4 U2.9 | length 60.5
  TOP w0.2: v2(13.691,21.59) 13.691,22.708 13.919,22.936 14.974,22.936 15.174,22.736 U2.9
  LAYER_2 w0.152: v2(13.157,12.395) 17.399,12.395 19.152,10.643 44.298,10.643 45.542,11.887 57.697,11.887 J15.4
  BOTTOM w0.152: v2(13.157,12.395) 13.157,21.057 v2(13.691,21.59)
GND: C1.1 C2.1 C5.2 C7.1 C8.1 C9.1 C10.1 C11.1 C12.1 C13.1 C14.1 C15.1 C16.2 C17.2 C18.1 C19.1 C20.1 C21.1 C22.1 C25.2 C26.2 C27.2 C28.2 C29.2 C30.2 C31.2 C32.2 C33.2 C34.1 C35.2 C36.1 C37.2 C38.2 C39.1 CON1.8 CON1.13 D4.1 D5.1 D6.1 D7.2 J1.2 J2.1 J2.2 J2.3 J2.4 J2.A1B12 J2.B1A12 J3.4 J3.5 J3.6 J4.3 J4.4 J4.5 J5.2 J5.7 J5.8 J6.6 J6.9 J6.10 J7.3 J7.4 J12.2 J18.1 J18.2 J19.1 J19.2 J20.1 J20.2 R16.1 R18.1 R19.1 R20.1 R26.1 R27.1 R42.2 SW1.4 U1.12 U1.18 U1.60 U1.63 U2.8 U3.4 U3.7 U4.4 U4.7 U5.4 U5.7 U6.2 U7.2 U8.2 U9.2 U9.8
  other v1: 2.54,0.762 4.064,0.762 5.842,0.762 7.366,0.762 8.89,0.762 10.414,0.762 11.684,0.762 14.224,0.762 15.748,0.762 17.018,0.762 19.05,0.762 20.828,0.762 22.86,0.762 24.13,0.762 25.4,0.762 26.924,0.762 28.194,0.762 29.464,0.762 30.734,0.762 32.004,0.762 33.02,0.762 34.798,0.762 36.068,0.762 37.846,0.762 39.37,0.762 40.894,0.762 43.18,0.762 44.704,0.762 45.974,0.762 47.244,0.762 48.514,0.762 50.038,0.762 52.832,0.762 54.102,0.762 55.88,0.762 57.15,0.762 58.42,0.762 59.944,0.762 61.468,0.762 63.246,0.762 64.77,0.762 66.548,0.762 68.326,0.762 69.596,0.762 71.374,0.762 72.898,0.762 74.168,0.762 75.692,0.762 77.47,0.762 78.994,0.762 80.772,0.762 84.328,0.762 85.344,0.762 88.392,0.762 1.27,1.016 89.154,1.524 63.754,1.778 0.762,2.032 7.874,2.032 69.088,2.032 78.994,2.032 81.28,2.032 43.434,2.286 46.482,2.286 50.038,2.286 72.136,2.286 74.93,2.286 23.114,2.54 25.908,2.54 28.702,2.54 31.496,2.54 39.878,2.54 53.34,2.54 57.15,2.54 60.452,2.54 64.77,2.54 1.778,2.794 15.748,2.794 19.812,2.794 35.56,2.794 85.09,2.794 86.868,2.794 89.154,2.794 11.684,3.048 68.072,3.048 0.762,3.302 44.958,3.556 48.514,3.556 29.718,3.81 40.894,3.81 63.754,3.81 69.088,3.81 1.778,4.064 60.706,4.064 70.866,4.064 74.93,4.064 77.978,4.064 89.154,4.064 0.762,4.572 7.874,4.826 64.77,4.826 68.072,4.826 69.596,4.826 39.98,5.029 35.56,5.08 53.34,5.08 75.641,5.156 1.778,5.334 11.684,5.334 19.812,5.334 89.154,5.334 85.09,5.588 86.868,5.588 0.762,5.842 9.652,6.35 89.154,6.604 18.034,6.858 21.844,6.858 0.762,7.112 2.54,7.112 7.874,7.112 44.958,7.112 53.594,7.112 55.372,7.112 60.706,7.112 62.484,7.112 65.024,7.112 67.564,7.112 70.612,7.112 75.387,7.722 89.154,7.874 85.09,8.128 86.868,8.128 0.762,8.382 2.54,8.382 53.086,8.89 56.134,8.89 78.74,9.144 81.28,9.144 89.154,9.144 63.754,9.398 65.786,9.398 71.374,9.398 75.184,9.398 0.762,9.652 2.54,9.652 48.844,10.262 49.708,10.262 73.076,10.414 89.154,10.414 70.104,10.566 4.572,10.668 0.762,10.922 2.54,10.922 89.154,11.684 78.232,11.938 80.264,11.938 81.28,11.938 86.614,11.938 10.338,12.014 0.762,12.192 2.54,12.192 4.572,12.192 33.274,12.192 36.068,12.192 38.862,12.192 52.324,12.446 56.896,12.7 86.614,12.7 34.544,12.954 70.104,12.954 72.644,12.954 89.154,12.954 37.592,13.208 64.008,13.208 0.762,13.462 2.54,13.462 4.572,13.462 41.402,13.462 61.214,13.716 82.296,13.716 85.09,13.716 27.864,13.818 36.068,13.97 56.388,13.97 34.011,14.072 23.114,14.224 38.862,14.224 52.324,14.224 89.154,14.224 0.762,14.732 4.572,14.986 33.274,14.986 36.932,14.986 50.292,14.986 27.864,15.24 70.104,15.24 72.644,15.24 81.28,15.24 85.09,15.24 21.844,15.494 24.13,15.494 56.388,15.494 6.096,15.748 89.154,15.748 0.762,16.002 8.89,16.002 10.414,16.002 11.684,16.002 12.446,16.002 38.862,16.002 52.324,16.002 82.296,16.256 65.278,16.51 63.068,16.586 83.312,16.764 0.762,17.272 49.174,17.272 81.28,17.272 89.154,17.272 63.779,17.45 26.543,17.475 22.352,17.526 23.876,17.526 43.205,17.526 55.118,17.526 70.104,18.034 72.644,18.034 32.537,18.085 0.762,18.542 9.144,18.542 10.668,18.542 11.43,18.542 33.045,18.567 14.707,18.669 5.842,18.796 6.858,18.796 89.154,18.796 41.402,19.304 16.51,19.406 0.762,19.812 2.54,19.812 4.064,19.812 35.966,20.015 36.576,20.041 5.842,20.066 6.858,20.066 64.516,20.066 52.984,20.218 44.958,20.32 45.72,20.32 89.154,20.32 81.534,20.828 83.82,20.828 0.762,21.082 2.54,21.082 4.064,21.082 26.416,21.082 55.067,21.133 5.842,21.336 6.858,21.336 10.922,21.336 69.088,21.336 72.39,21.336 75.692,21.336 85.852,21.336 89.154,21.844 0.762,22.352 2.54,22.352 85.852,22.352 81.534,22.606 83.82,22.606 5.842,23.114 6.858,23.114 89.154,23.368 0.762,23.622 2.54,23.622 10.922,24.13 5.842,24.384 6.858,24.384 8.382,24.384 9.652,24.384 56.845,24.486 1.778,24.892 3.048,24.892 83.82,24.892 89.154,24.892 9.652,25.146 10.922,25.146 12.192,25.146 13.208,25.146 14.224,25.146 66.802,25.781 61.976,25.908 17.272,26.035 18.694,26.06 9.652,26.162 10.922,26.162 12.192,26.162 13.208,26.162 14.224,26.162 15.215,26.162 75.184,26.162 78.74,26.162 82.042,26.162 0.762,26.416 56.134,26.416 57.912,26.416 59.436,26.416 89.154,26.67 52.07,26.924 53.34,26.924 61.976,27.178 34.544,27.432 36.068,27.432 56.134,27.432 57.912,27.432 9.652,27.686 12.192,27.686 13.208,27.686 25.146,27.686 25.908,27.686 38.1,27.94 77.216,27.94 80.264,27.94 83.312,27.94 74.803,28.042 0.762,28.194 89.154,28.194 25.146,28.448 25.908,28.448 42.418,28.448 43.434,28.448 36.068,28.702 37.338,28.702 38.862,28.702 9.652,28.956 10.922,28.956 12.192,28.956 13.208,28.956 18.796,28.956 19.812,28.956 30.988,28.956 25.146,29.21 25.908,29.21 42.926,29.21 71.882,29.464 66.904,29.515 0.762,29.718 18.796,29.972 25.146,29.972 25.908,29.972 36.068,29.972 37.338,29.972 89.154,29.972 9.652,30.226 10.922,30.226 12.192,30.226 13.208,30.226 13.97,30.226 30.988,30.226 33.528,30.226 66.472,30.302 74.168,30.48 77.216,30.48 80.264,30.48 83.312,30.48 0.762,31.242 18.796,31.242 36.068,31.242 37.338,31.242 38.862,31.242 51.054,31.242 52.832,31.242 30.988,31.496 33.528,31.496 45.212,31.496 46.99,31.496 89.154,31.496 18.796,32.258 2.032,32.334 0.762,32.512 20.066,32.512 21.59,32.512 22.606,32.512 34.798,32.512 36.068,32.512 37.338,32.512 38.862,32.512 86.614,32.512 7.112,32.766 7.874,32.766 8.636,32.766 9.398,32.766 10.16,32.766 30.988,32.766 21.082,33.02 22.098,33.02 23.114,33.02 41.656,33.02 43.688,33.02 74.168,33.02 77.216,33.02 80.01,33.02 82.804,33.02 89.154,33.02 0.762,33.782 30.988,34.036 41.656,34.036 43.688,34.036 69.342,34.036 70.866,34.036 73.152,34.036 75.692,34.036 78.486,34.036 81.28,34.036 84.328,34.036 87.122,34.036 2.642,34.112 34.29,34.544 36.576,34.544 38.862,34.544 88.9,34.544 1.27,35.052 2.286,35.306 3.556,35.306 5.08,35.306 6.858,35.306 8.382,35.306 9.906,35.306 11.684,35.306 13.462,35.306 14.986,35.306 16.51,35.306 18.288,35.306 20.066,35.306 22.098,35.306 23.368,35.306 25.4,35.306 27.432,35.306 29.718,35.306 31.496,35.306 33.528,35.306 35.56,35.306 37.592,35.306 39.624,35.306 41.656,35.306 43.688,35.306 45.466,35.306 47.244,35.306 49.022,35.306 50.8,35.306 52.832,35.306 54.864,35.306 56.642,35.306 58.42,35.306 60.198,35.306 61.976,35.306 63.754,35.306 65.278,35.306 67.056,35.306 68.834,35.306 70.358,35.306 72.39,35.306 74.168,35.306 75.946,35.306 77.724,35.306 79.502,35.306 81.28,35.306 83.058,35.306 84.582,35.306 86.106,35.306 87.63,35.306
HA: R5.2 U1.41 | length 34.4
  TOP w0.152: R5.2 v2(20.726,25.023) ; v2(47.498,25.121) 47.498,24.689 47.955,24.232 47.955,22.428 49.002,21.382 U1.41
  LAYER_2 w0.152: v2(20.726,25.023) 21.281,25.578 47.041,25.578 v2(47.498,25.121)
HALL_A: J5.5 R35.1 U1.37 | length 18.7
  TOP w0.152: v2(48.209,19.837) 48.667,19.38 50.011,19.38 50.014,19.383 U1.37
  TOP w0.2: J5.5 48.895,5.282 v2(48.895,6.579) 48.895,7.246 R35.1
  BOTTOM w0.152: v2(48.209,19.837) 48.209,7.239 48.564,6.884 48.59,6.884 v2(48.895,6.579)
HALL_B: J5.4 R36.1 U1.38 | length 19.6
  TOP w0.152: v2(48.209,20.65) 48.975,19.885 49.434,19.885 49.436,19.883 U1.38
  TOP w0.2: J5.4 47.65,5.287 v2(47.65,6.579) 47.65,7.241 R36.1
  BOTTOM w0.152: v2(47.65,6.579) 47.65,20.091 v2(48.209,20.65)
HALL_C: J5.3 R37.1 U1.39 | length 21.1
  TOP w0.152: v2(48.184,21.438) 49.238,20.383 U1.39
  TOP w0.2: J5.3 46.406,5.292 v2(46.406,6.579) 46.406,7.236 R37.1
  BOTTOM w0.152: v2(46.406,6.579) 47.295,7.468 47.295,20.549 v2(48.184,21.438)
HB: R3.2 U1.42 | length 35.6
  TOP w0.152: R3.2 v2(19.725,25.023) ; v2(48.311,25.095) 48.311,22.606 49.035,21.882 U1.42
  LAYER_2 w0.152: v2(19.725,25.023) 20.636,25.933 47.473,25.933 v2(48.311,25.095)
HC: R1.2 U1.43 | length 37.2
  TOP w0.152: R1.2 v2(18.72,25.019) ; v2(49.026,25.126) 49.026,24.694 48.666,24.334 48.666,22.784 49.068,22.383 U1.43
  LAYER_2 w0.152: v2(18.72,25.019) 20.015,26.314 47.838,26.314 v2(49.026,25.126)
KEY_A: R43.2 U1.40 | length 12
  TOP w0.152: U1.40 52.532,20.884 53.67,22.022 59.69,22.022 61.036,20.676 R43.2
KEY_B: R44.2 U1.33 | length 22.6
  TOP w0.152: U1.33 51.217,10.404 51.689,9.931 61.316,9.931 61.747,10.363 61.747,12.421 62.459,13.132 R44.2
KEY_C: R45.2 U1.28 | length 22.6
  TOP w0.152: U1.28 47.216,10.112 47.777,9.55 61.57,9.55 62.459,10.439 R45.2
KEY_CEN: R47.1 U1.56 | length 44
  TOP w0.152: v2(45.339,22.479) 44.806,23.012 44.806,24.308 45.715,25.217 U1.56 ; R47.1 v2(79.629,22.733)
  LAYER_2 w0.152: v2(45.339,22.479) 46.228,22.479 46.89,23.141 79.221,23.141 v2(79.629,22.733)
KEY_D: R46.1 U1.2 | length 57.7
  TOP w0.152: v2(37.973,26.822) 37.973,24.536 38.125,24.384 U1.2 ; R46.1 79.642,14.765 80.213,15.336 v2(80.213,25.146)
  LAYER_2 w0.152: v2(37.973,26.822) 48.412,26.822 50.089,25.146 v2(80.213,25.146)
LA: R6.2 U1.34 | length 35.7
  TOP w0.152: R6.2 v2(21.717,25.019) ; v2(45.415,23.952) 46.584,23.952 46.838,23.698 46.838,19.253 48.209,17.882 U1.34
  LAYER_2 w0.152: v2(21.717,25.019) 22.784,23.952 v2(45.415,23.952)
LB: R4.2 U1.35 | length 34.5
  TOP w0.152: R4.2 v2(22.733,25.019) ; v2(46.025,24.486) 46.609,24.486 47.193,23.901 47.193,19.431 48.242,18.382 U1.35
  LAYER_2 w0.152: v2(22.733,25.019) 23.266,24.486 v2(46.025,24.486)
LC: R2.2 U1.36 | length 33.3
  TOP w0.152: R2.2 v2(23.749,25.019) ; v2(46.634,25.019) 47.549,24.105 47.549,19.634 48.301,18.882 U1.36
  LAYER_2 w0.152: v2(23.749,25.019) v2(46.634,25.019)
LED_GREEN: R15.1 U1.26 | length 50.3
  TOP w0.152: v2(5.994,9.373) 5.994,5.855 6.528,5.321 R15.1 ; v2(45.771,9.373) 46.215,9.817 U1.26
  LAYER_2 w0.152: v2(5.994,9.373) v2(45.771,9.373)
LED_RED: R17.1 U1.27 | length 51.3
  TOP w0.152: R17.1 4.902,5.321 5.461,5.88 v2(5.461,8.865) ; v2(46.711,9.373) 46.711,14.175 46.716,14.18 U1.27
  LAYER_2 w0.152: v2(5.461,8.865) 46.203,8.865 v2(46.711,9.373)
M_TEMP: C35.1 J5.6 R34.1 U1.24 | length 17.3
  TOP w0.2: U1.24 45.217,9.063 45.517,8.763 51.181,8.763 51.473,8.471 C35.1 R34.1 J5.6
MISO_ADC_EXT2: J6.4 U1.22 | length 25.9
  TOP w0.152: J6.4 27.258,6.76 27.889,7.391 42.85,7.391 44.216,8.758 U1.22
NetC1_2: C1.2 U1.5 Y1.2 | length 6.7
  TOP w0.2: Y1.2 34.032,24.681 35.46,23.254 C1.2 37.071,23.254 37.442,22.883 U1.5
NetC2_2: C2.2 U1.6 Y1.1 | length 6.7
  TOP w0.2: Y1.1 34.032,20.582 35.46,22.009 C2.2 37.097,22.009 37.47,22.383 U1.6
NetC16_1: C16.1 U1.31 | length 3
  TOP w0.2: C16.1 U1.31
NetC17_1: C17.1 U1.47 | length 3.7
  TOP w0.152: U1.47 C17.1
NetC23_1: C23.1 L2.1 U7.6 | length 3.5
  TOP w0.2: U7.6 23.836,31.456 23.901,31.521 23.901,31.567 24.468,32.134 C23.1 25.516,32.259 L2.1
NetC23_2: C23.2 U7.1
NetC24_1: C24.1 D7.1 L1.1 U6.6 | length 5.3
  TOP w0.2: U6.6 10.39,31.371 10.483,31.277 D7.1 C24.1 L1.1
NetC24_2: C24.2 U6.1
NetCON1_11: CON1.11 R42.1 | length 15.5
  TOP w0.152: R42.1 65.532,31.09 66.071,31.628 CON1.11 CON1.11@69.899,31.628
NetD4_2: D4.2 R15.2 | length 1.3
  TOP w0.2: D4.2 R15.2
NetD5_2: D5.2 R17.2 | length 1.3
  TOP w0.2: D5.2 R17.2
NetD6_2: D6.2 R21.2 | length 1.3
  TOP w0.2: D6.2 R21.2
NetJ2_A4B9: J2.A4B9 J2.B4A9 R28.1 | length 9.3
  TOP w0.3: R28.1 80.984,7.722 81.005,7.7 J2.B4A9 82.394,7.544 83.495,7.544 83.795,7.244 83.795,3.373 83.493,3.072 82.41,3.072 J2.A4B9
NetJ2_A6: J2.A6 J2.B6 R31.1 | length 4.8
  TOP w0.152: R31.1 81.468,6.045 81.472,6.049 J2.B6 83.21,6.049 83.3,5.959 83.3,5.141 83.21,5.051 J2.A6
NetJ2_A7: J2.A7 J2.B7 R32.1 | length 3.7
  TOP w0.152: R32.1 81.069,4.547 81.2,4.678 ; J2.B7 81.327,4.551 81.2,4.678 ; J2.A7 81.327,5.549 81.2,5.422 81.2,4.678
NetJ3_2: J3.2 R29.1 | length 1.9
  TOP w0.2: J3.2 R29.1
NetJ3_3: J3.3 R30.1 | length 1.9
  TOP w0.2: J3.3 R30.1
NetJ4_1: J4.1 R33.1 | length 1.7
  TOP w0.152: J4.1 R33.1
NetR1_1: R1.1 U2.3 | length 2.1
  TOP w0.152: R1.1 18.72,23.034 19.075,22.679 U2.3
NetR2_1: R2.1 U2.6 | length 11.4
  TOP w0.152: U2.6 17.124,20.188 17.551,19.761 22.809,19.761 23.749,20.701 R2.1
NetR3_1: R3.1 U2.2 | length 1.9
  TOP w0.152: U2.2 R3.1
NetR4_1: R4.1 U2.5 | length 9.5
  TOP w0.152: U2.5 17.775,20.325 18.009,20.091 22.25,20.091 22.733,20.574 R4.1
NetR5_1: R5.1 U2.1 | length 2.1
  TOP w0.152: U2.1 20.376,22.683 20.726,23.034 R5.1
NetR6_1: R6.1 U2.4 | length 7.3
  TOP w0.152: U2.4 18.425,20.526 18.53,20.421 21.412,20.421 21.717,20.726 R6.1
NetR23_1: R23.1 R26.2 U6.3 | length 2.6
  TOP w0.2: R23.1 R26.2 U6.3
NetR24_2: R24.2 U7.4 | length 1.3
  TOP w0.2: R24.2 U7.4
NetR25_1: R25.1 R27.2 U7.3 | length 2.5
  TOP w0.2: R25.1 R27.2 U7.3
NetR40_1: R40.1 U9.1 | length 2
  TOP w0.3: U9.1 R40.1
NetR41_1: R41.1 U9.4 | length 2
  TOP w0.3: U9.4 R41.1
NetR43_1: R43.1 SW1.1 | length 4.4
  TOP w0.152: R43.1 65.024,20.676 65.518,20.181 SW1.1
NetR44_1: R44.1 SW1.2 | length 2.2
  TOP w0.152: R44.1 SW1.2
NetR45_1: R45.1 SW1.3 | length 2.2
  TOP w0.152: R45.1 SW1.3
NetR46_2: R46.2 SW1.5 | length 2.2
  TOP w0.152: SW1.5 R46.2
NetR47_2: R47.2 SW1.6 | length 2.2
  TOP w0.152: SW1.6 R47.2
NRST: C5.1 U1.7 | length 7.1
  TOP w0.2: C5.1 36.373,18.567 37.236,19.431 37.236,21.412 37.706,21.882 U1.7
OLED_CS: CON1.7 U1.50 | length 41.1
  TOP w0.152: U1.50 48.717,28.039 48.873,28.194 59.562,28.194 60.173,27.584 60.985,27.584 62.382,28.981 64.135,28.981 64.668,28.448 64.668,24.384 66.7,22.352 72.06,22.352 72.923,23.216 72.923,28.346 72.442,28.828 CON1.7
OLED_DC: CON1.5 U1.54 | length 39.8
  TOP w0.152: U1.54 46.716,29.088 47.338,29.711 64.65,29.711 65.405,28.956 65.405,24.765 65.43,24.74 65.43,24.613 66.904,23.139 71.476,23.139 72.009,23.673 72.009,27 71.581,27.428 CON1.5
OLED_MOSI: CON1.3 U1.57 | length 37.9
  TOP w0.152: U1.57 45.217,29.037 46.595,30.415 65.165,30.415 66.142,29.439 66.142,24.892 67.107,23.927 70.815,23.927 71.069,24.181 71.069,25.756 70.797,26.028 CON1.3
OLED_RST: CON1.6 U1.53 | length 40.9
  TOP w0.152: U1.53 47.216,28.979 47.599,29.362 64.364,29.362 65.049,28.677 65.049,24.486 66.802,22.733 71.73,22.733 72.441,23.444 72.441,27.661 71.973,28.128 CON1.6
OLED_SCLK: CON1.4 U1.55 | length 38.7
  TOP w0.152: U1.55 46.215,29.299 46.979,30.063 64.908,30.063 65.761,29.21 65.761,24.765 67.005,23.52 71.095,23.52 71.526,23.952 71.526,26.314 71.113,26.728 CON1.4
PHA: J13.3 U3.3 | length 6.9
  TOP w0.2: U3.3 27.198,15.946 27.711,16.459 29.171,16.459 J13.3
PHB: J15.3 U4.3 | length 7
  TOP w0.2: U4.3 55.763,16.114 56.109,16.459 57.671,16.459 J15.3
PHC: J16.2 U5.3 | length 7.2
  TOP w0.2: U5.3 84.475,15.971 84.938,16.434 86.396,16.434 J16.2
RX_SDA_NSS: J6.2 U1.20 U1.30 | length 36.1
  TOP w0.152: J6.2 24.758,7.309 25.552,8.103 42.52,8.103 43.216,8.799 U1.20 43.216,16.723 44.171,17.678 47.142,17.678 48.217,16.604 U1.30
SCK_ADC_EXT: J6.3 U1.21 | length 26.9
  TOP w0.152: J6.3 26.008,7.11 26.645,7.747 42.697,7.747 43.716,8.765 U1.21
SERVO: C34.2 R33.2 U1.58 | length 53.2
  TOP w0.152: U1.58 44.717,29.477 v2(45.11,29.87) ; v2(62.789,22.428) 65.049,22.428 67.996,19.482 67.996,8.687 68.682,8.001 74.079,8.001 74.231,7.849 C34.2 R33.2
  LAYER_2 w0.152: v2(45.11,29.87) 61.29,29.87 v2(62.789,28.372)
  BOTTOM w0.152: v2(62.789,22.428) v2(62.789,28.372)
SHA: C6.1 J13.2 R11.2 U2.18 U3.2 | length 33.1
  TOP w0.2: U3.2 26.548,16.109 27.381,16.942 29.172,16.942 J13.2 32.029,16.141 ; v2(31.496,11.709) 32.029,12.243 32.029,16.141 ; R11.2 32.043,16.154 32.029,16.141
  TOP w0.3: U2.18 19.075,14.554 19.845,13.785 C6.1 v2(19.845,11.709)
  LAYER_2 w0.2: v2(19.845,11.709) v2(31.496,11.709)
SHB: C4.1 J15.2 R12.2 U2.15 U4.2 | length 67.2
  TOP w0.2: U4.2 55.113,16.175 55.88,16.942 57.672,16.942 J15.2 60.237,19.507 R12.2
  TOP w0.3: v2(17.026,11.709) C4.1 17.026,13.665 17.124,13.764 U2.15
  LAYER_2 w0.2: v2(17.026,11.709) 18.524,10.211 44.628,10.211 45.949,11.532 59.944,11.532 v2(60.3,11.887)
  BOTTOM w0.2: J15.2 60.3,16.37 v2(60.3,11.887)
SHC: C3.1 J16.1 R13.2 U2.12 U5.2 | length 95.3
  TOP w0.2: U5.2 83.825,16.109 84.633,16.916 86.346,16.916 J16.1 87.4,18.997 86.968,19.429 R13.2
  TOP w0.3: v2(14.203,11.709) C3.1 14.203,13.741 15.174,14.712 U2.12
  LAYER_2 w0.2: v2(14.203,11.709) 16.154,11.709 18.085,9.779 44.983,9.779 46.33,11.125 85.623,11.125 v2(85.979,11.481)
  BOTTOM w0.2: v2(85.979,11.481) 85.979,16.549 J16.1
SHUTDOWN: R38.1 U1.25 | length 56
  TOP w0.152: U1.25 v2(45.715,16.815)
  TOP w0.2: v2(5.08,30.095) R38.1
  LAYER_2 w0.152: v2(5.08,16.815) v2(45.715,16.815)
  BOTTOM w0.152: v2(5.08,16.815) v2(5.08,30.095)
SWCLK: J1.4 U1.49 | length 8.8
  TOP w0.152: U1.49 v2(49.733,26.883)
  BOTTOM w0.152: J1.4 49.733,30.133 v2(49.733,26.883)
SWDIO: J1.3 U1.46 | length 12.1
  TOP w0.152: v2(50.292,26.162) 49.708,25.578 49.708,24.054 49.878,23.884 U1.46
  BOTTOM w0.152: J1.3 48.703,31.79 50.292,30.201 v2(50.292,26.162)
TX_SCL_MOSI: J6.5 U1.23 U1.29 | length 31.4
  TOP w0.152: J6.5 28.507,6.536 29.032,7.061 43.053,7.061 44.717,8.725 U1.23 44.717,17.003 45.062,17.348 46.99,17.348 47.716,16.622 U1.29
UART_RX: R30.2 U1.52 | length 48.6
  TOP w0.152: U1.52 47.716,28.514 48.057,28.854 v2(61.29,28.854) ; R30.2 66.954,8.026 67.64,8.712 67.64,19.371 65.218,21.793 61.925,21.793 v2(61.29,22.428)
  BOTTOM w0.152: v2(61.29,22.428) v2(61.29,28.854)
UART_TX: R29.2 U1.51 | length 47.6
  TOP w0.152: U1.51 48.217,28.252 48.489,28.524 60.198,28.524 v2(60.528,28.194) ; R29.2 58.075,8.039 58.647,8.611 66.878,8.611 67.259,8.992 67.259,19.253 65.049,21.463 61.493,21.463 v2(60.528,22.428)
  BOTTOM w0.152: v2(60.528,22.428) v2(60.528,28.194)
USB_DM: R32.2 U1.44 | length 44.2
  TOP w0.152: U1.44 52.473,22.883 52.571,22.981 65.081,22.981 68.428,19.634 68.428,8.865 68.859,8.433 76.302,8.433 76.454,8.281 76.454,5.664 76.974,5.144 79.459,5.144 79.611,4.992 R32.2
USB_DP: R31.2 U1.45 | length 44.2
  TOP w0.152: U1.45 52.473,23.383 52.571,23.285 65.207,23.285 68.732,19.76 68.732,8.991 68.985,8.737 76.428,8.737 76.758,8.407 76.758,5.79 77.1,5.448 79.459,5.448 79.611,5.6 R31.2
VB1: C6.2 D3.1 U2.20 | length 4.8
  TOP w0.3: U2.20 20.376,14.712 21.247,13.84 C6.2 21.247,11.597 D3.1
VB2: C4.2 D2.1 U2.17 | length 4.4
  TOP w0.3: U2.17 18.425,13.668 18.427,13.665 C4.2 18.427,11.554 D2.1
VB3: C3.2 D1.1 U2.14 | length 4.7
  TOP w0.3: D1.1 15.605,11.529 C3.2 15.605,13.843 16.474,14.712 U2.14
VIN: C26.1 C27.1 J12.1 R14.2 R22.2 U6.5 | length 4.6
  TOP w0.2: J12.1 2.934,29.804 R14.2 ; C26.1 6.223,29.228 R22.2
VOLTAGE_A: C19.2 R11.1 R16.2 U1.14 | length 7
  TOP w0.2: R16.2 R11.1 C19.2 36.043,16.279 38.146,18.382 U1.14
VOLTAGE_B: C20.2 R12.1 R18.2 U1.15 | length 26.2
  TOP w0.2: U1.15 41.148,17.882 v2(41.707,18.44) ; v2(61.925,16.8) C20.2 R12.1 R18.2
  LAYER_2 w0.2: v2(41.707,18.44) 55.931,18.44 57.571,16.8 v2(61.925,16.8)
VOLTAGE_C: C21.2 R13.1 R19.2 U1.16 | length 55.9
  TOP w0.2: U1.16 41.514,17.384 43.459,19.329 v2(43.459,22.733) ; R13.1 R19.2 C21.2 v2(87.832,23.19)
  LAYER_2 w0.2: v2(43.459,22.733) 44.475,22.733 44.75,23.008 45.969,23.008 46.457,23.495 85.014,23.495 85.319,23.19 v2(87.832,23.19)
pads on no net: CON1.1 CON1.2 CON1.9 J2.A5 J2.A8 J2.B5 J2.B8 J2.PH1 J2.PH2 U1.3 U1.4 U3.1 U4.1 U5.1 U8.4

## Polygon pours and split planes (outlines as drawn)
no net on TOP "TOP-N2612190" (solid, pour order 0): 9.246,34.62 11.709,34.62 11.709,33.807 10.135,33.807 9.83,33.503 9.246,33.503
no net on TOP "TOP-N258294" (solid, pour order 1): 22.784,34.722 24.562,34.722 24.79,34.493 24.79,32.944 24.13,32.944 23.47,33.604 22.784,33.604
5V on TOP "TOP-5V" (solid, pour order 5): 28.27,34.493 28.27,26.721 32.893,26.721 32.893,27.635 30.632,27.635 30.302,27.965 30.302,34.239 30.048,34.493
no net on TOP "TOP-N258298" (solid, pour order 2): 22.784,32.055 23.622,32.055 24.232,32.664 26.238,32.664 26.238,31.14 25.933,30.836 22.784,30.836
VIN on TOP "TOP-VIN" (solid, pour order 4): 3.581,29.54 7.468,29.54 8.255,30.328 8.255,31.953 8.941,31.953 8.941,27.965 1.524,27.965 1.346,28.143 1.346,29.921 1.524,30.099 3.023,30.099
no net on TOP "TOP-N261255" (solid, pour order 3): 9.246,31.979 10.389,31.979 10.77,32.36 10.77,33.274 13.386,33.274 13.386,31.09 13.03,30.734 9.347,30.734 9.246,30.836
12V on TOP "TOP-12V" (solid, pour order 6): 15.621,34.62 15.621,27.102 15.977,26.746 22.606,26.746 22.911,26.746 22.962,26.797 22.962,30.201 22.555,30.607 22.555,32.004 21.844,32.004 21.844,30.632 21.412,30.201 21.412,28.702 21.057,28.346 17.729,28.346 17.374,28.702 17.374,34.62
GND on TOP "TOP-GND" (solid, pour order 10): 0,41.173 0,0 94.005,0 94.005,41.173
GND on LAYER_1 "LAYER_1-GND" (solid, pour order 7): 0.321,38 0.321,0 94.321,0 94.321,38
GND on BOTTOM "BOTTOM-GND" (solid, pour order 8): 0,41.224 0,0 93.751,0 93.751,41.224
GND on LAYER_2 "LAYER_2-GND" (solid, pour order 9): 0,41.123 0,0 94.031,0 94.031,41.123

## Keep-outs
Keep-Out Layer:
  the board outline again, w0.025

## Silkscreen, mask and mechanical layers (free items; w line width, h text height)
DRAWING_ORIGIN:
  lines w0.025: -0.635,0 0.635,0 ; 0,-0.635 0,0.635